# Altium PCB TSSOP16-0.65-5X4.4MM_2021-09-21.pcbdoc
Units mm, origin at the board's own origin, x right, y up, seen from the top; angles counter-clockwise.
Board outline 34.11 x 32.69 mm, 2 copper layers (Top Layer, Bottom Layer); 1 components, 0 nets, 16 pads, 0 vias.
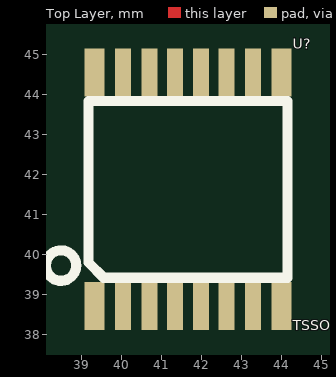
[diagram p0: Top Layer view]
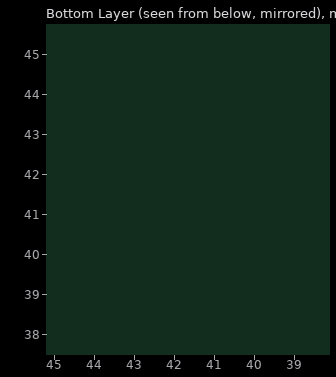
[diagram p1: Bottom Layer view, seen from below]

## Layer stack, top to bottom
Top Layer: signal copper (thickness not stored)
Dielectric: dielectric 0.32, FR-4, Dk 4.8
Bottom Layer: signal copper (thickness not stored)

## Board outline
59.512,25.4 25.4,25.4 25.4,58.095 59.512,58.095

## Components (designator, comment, footprint, x,y, rotation, side; value= is the part's Value field where it differs from the comment)
U? "TSSOP16-0.65-5X4.4MM" TSSOP16-0.65-5X4.4MM 41.186,41.62 r0 top

## Footprints (in the part's own frame and the unit in brackets; to place one, negate y for a bottom-side part, rotate by r counter-clockwise, add the part's x,y. Pads: shape width x height; smd on the part's side, far side on the other; paste and mask are expansions set on the pad)
TSSOP16-0.65-5X4.4MM [mil]
  rect 19.7x47.2 smd: 1(-73.5,-115) 8(110.5,-115) 9(110.5,115) 16(-73.5,115)
  rect 15.7x47.2 smd: 2(-45.5,-115) 3(-19.5,-115) 4(5.5,-115) 5(31.5,-115) 6(56.5,-115) 7(82.5,-115) 10(82.5,115) 11(56.5,115) 12(31.5,115) 13(5.5,115) 14(-19.5,115) 15(-45.5,115)
  silkscreen extent -121,-90 116,87

## Nets (pads, with @x,y where several pads share a name; then routed paths per layer and width w, separated by ;. In a path a pad name is that pad's centre, name@x,y a point inside that pad or via, vN(x,y) a via of type N, cw(c..) or ccw(c..) an arc to the next point about the centre after c; other vN are vias at no path point)
pads on no net: U?.1 U?.2 U?.3 U?.4 U?.5 U?.6 U?.7 U?.8 U?.9 U?.10 U?.11 U?.12 U?.13 U?.14 U?.15 U?.16

## Silkscreen, mask and mechanical layers (free items; w line width, h text height)
Document:
  lines w0.003: 42.431,41.722 42.481,41.773